# Altium PCB uARM.PcbDoc
Units mm, origin at the board's own origin, x right, y up, seen from the top; angles counter-clockwise.
Board outline 93 x 72.5 mm, 2 copper layers (Top Layer, Bottom Layer); 54 components, 40 nets, 216 pads, 71 vias.
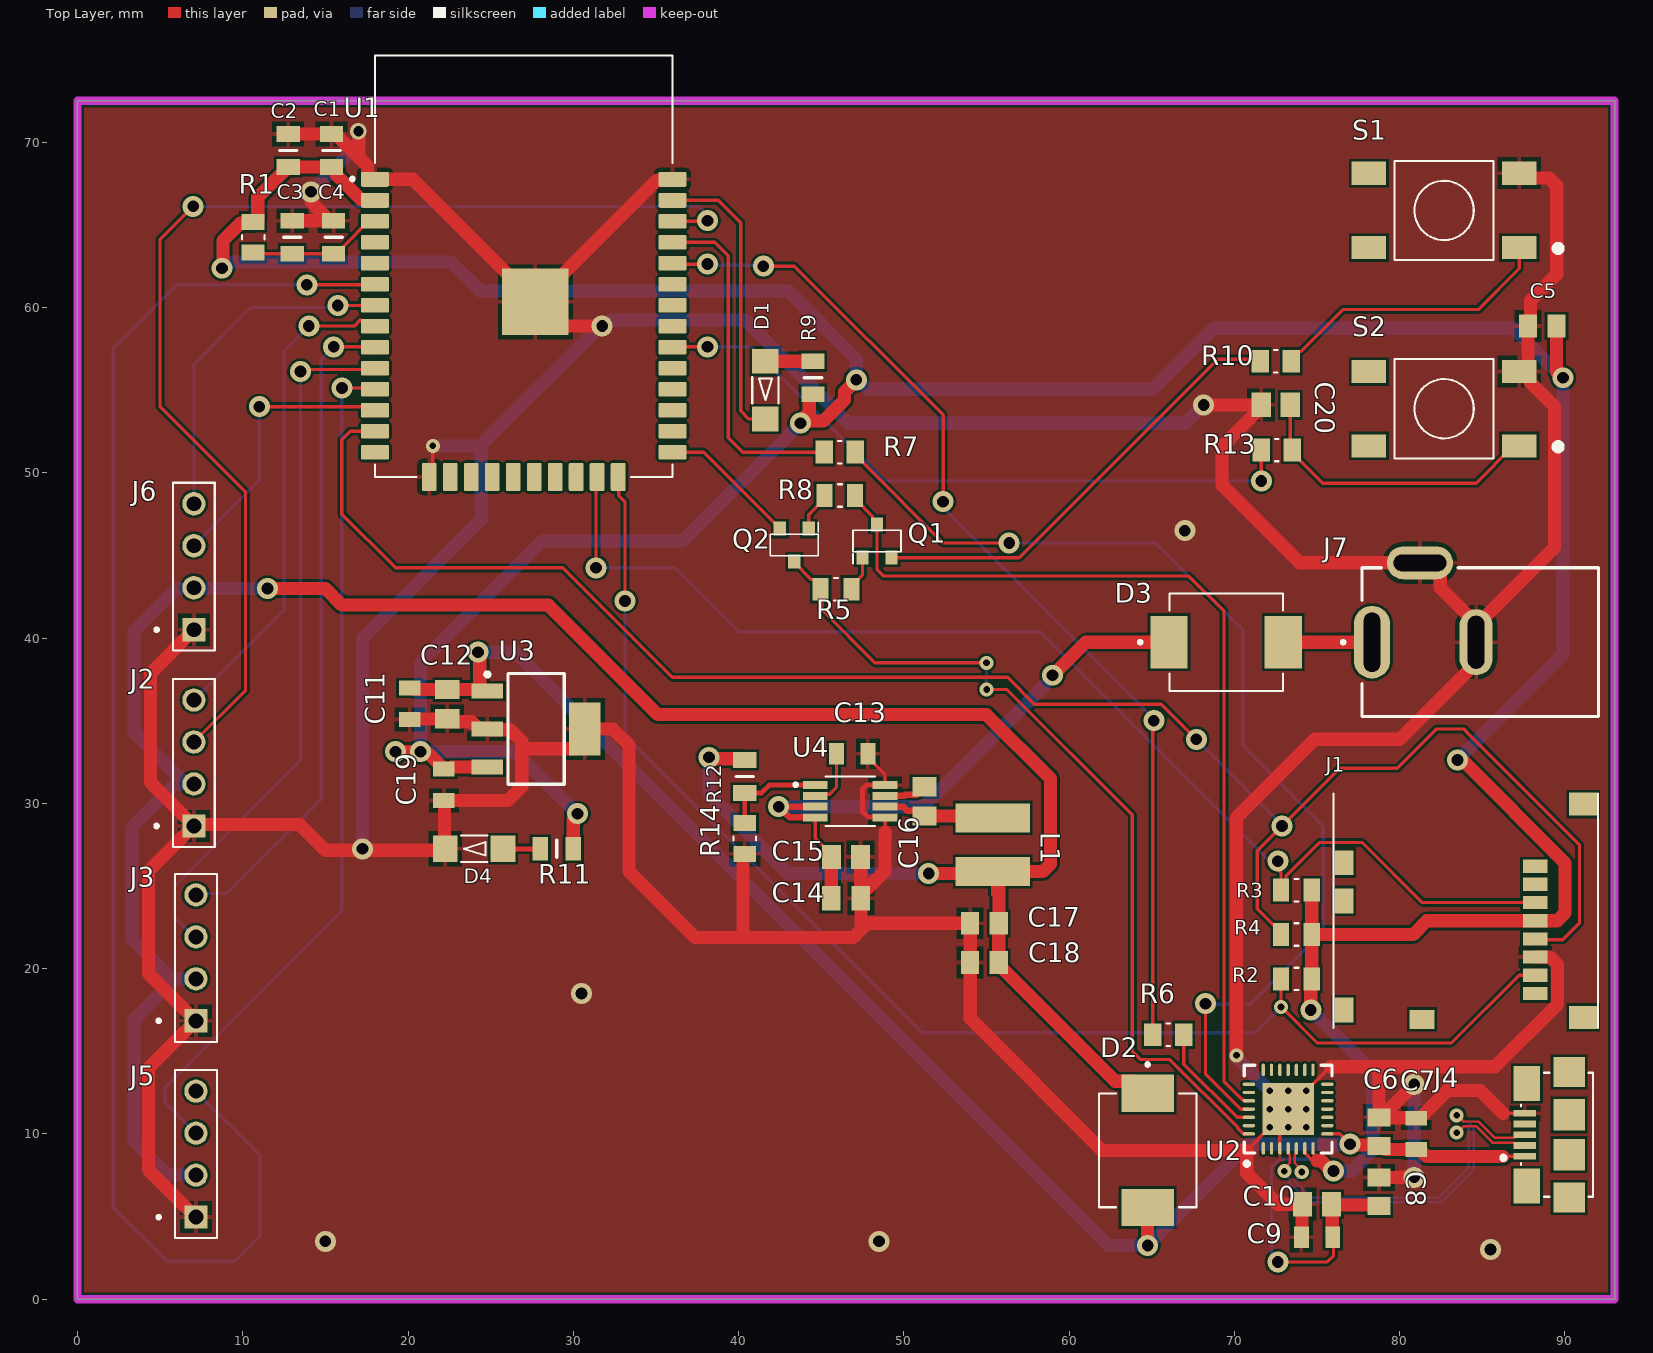
[diagram p0: Top Layer view]
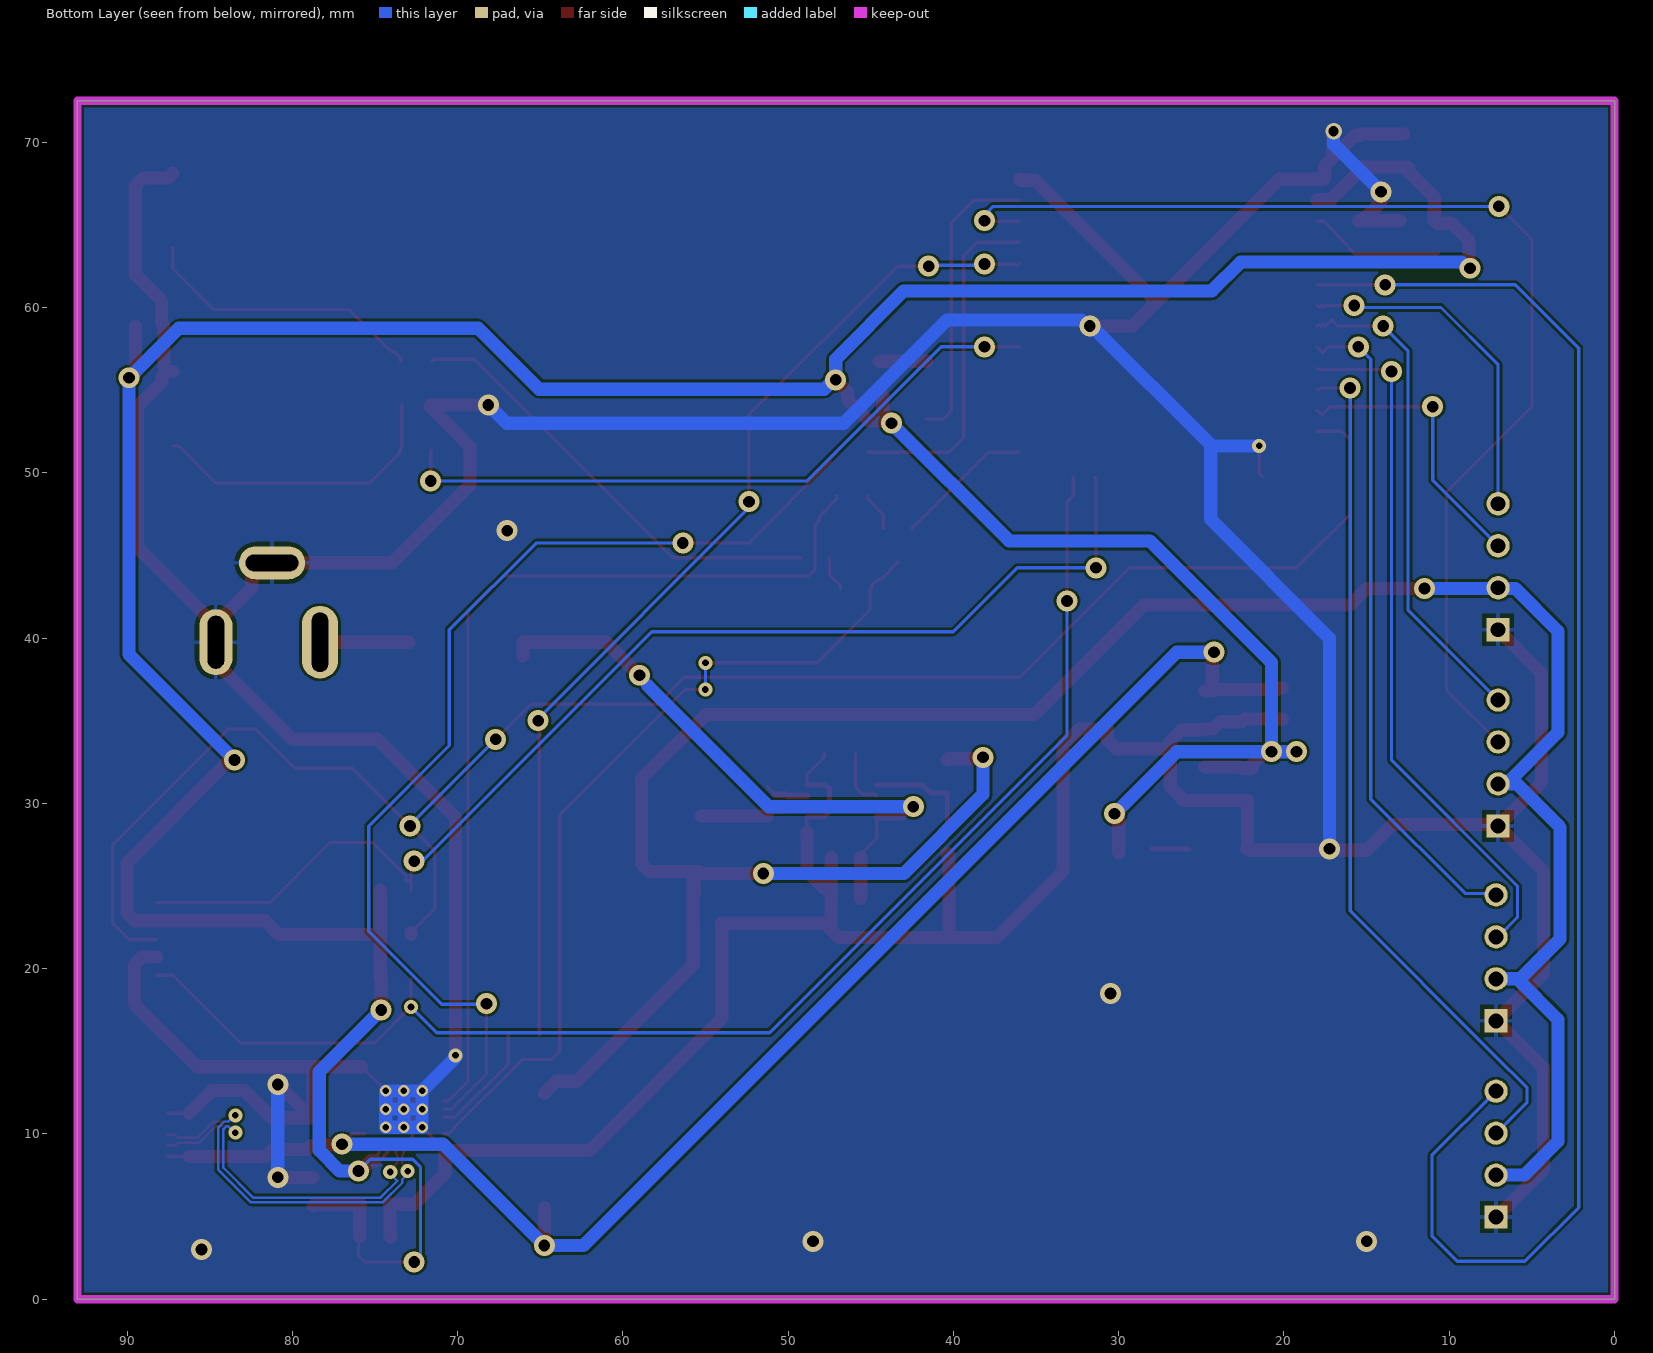
[diagram p1: Bottom Layer view, seen from below]
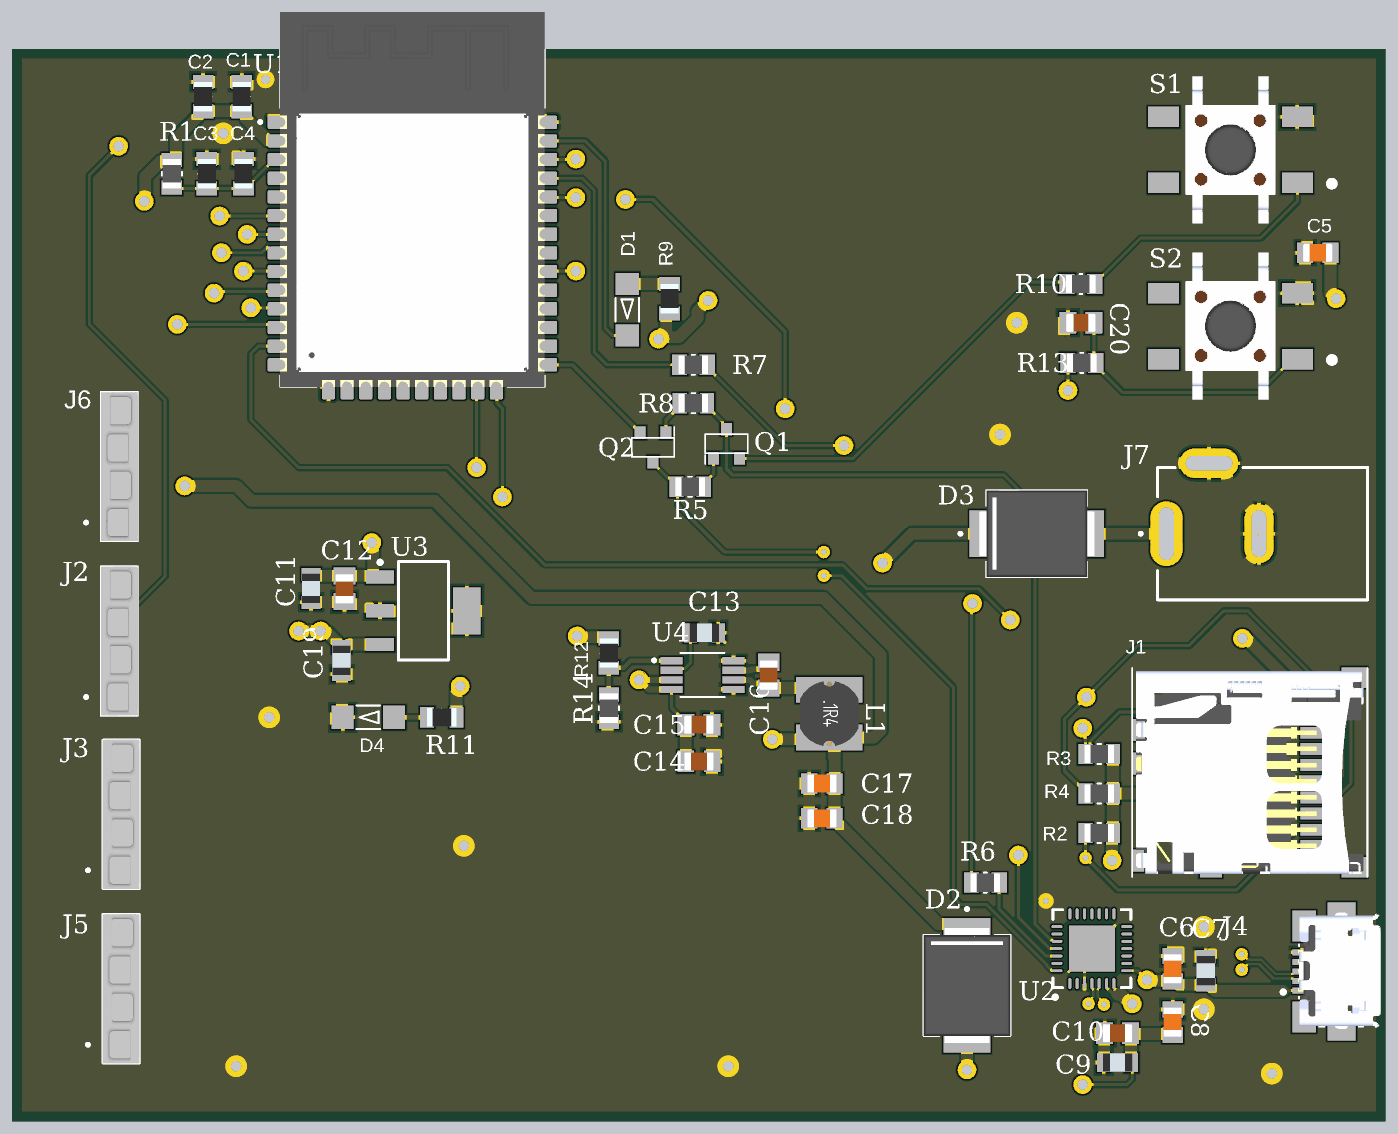
[diagram p2: 3D render of the assembled board from above, using the file's embedded part models]

## Layer stack, top to bottom
Top Solder: solder mask 0.0102, Solder Resist, Dk 3.5
Top Layer: signal copper 0.0356
Dielectric 1: dielectric 0.32, FR-4, Dk 4.8
Bottom Layer: signal copper 0.0356
Bottom Solder: solder mask 0.0102, Solder Resist, Dk 3.5

## Board outline
0,0 0,72.5 93,72.5 93,0

## Design rules (kind name [scope] priority, off if disabled: settings)
Clearance [All] p1: gap=0.15 ignorepadtopadclearanceinfootprint=FALSE
DiffPairsRouting [All] p1: maxlimit=0.15 minlimit=0.15 mostfreqgap=0.15 toplayer_minwidth=0.15 toplayer_maxwidth=0.15 toplayer_prefwidth=0.15 bottomlayer_minwidth=0.15 bottomlayer_maxwidth=0.15 bottomlayer_prefwidth=0.15 maxuncoupledlength=12.7
HoleSize [All] p1: absolutevalues=TRUE maxlimit=3.6 minlimit=0.3 maxpercent=80.000 minpercent=20.000
HoleToHoleClearance [All] p1: gap=0.254 allowstackedmicrovias=FALSE
PolygonConnect [All] p1: thpad.connectstyle=Relief thpad.reliefconductorwidth=0.254 thpad.reliefentries=4 thpad.polygonreliefangle="90 Angle" thpad.airgapwidth=0.254 smdpad.connectstyle=Relief smdpad.reliefconductorwidth=0.254 smdpad.reliefentries=4 smdpad.polygonreliefangle="90 Angle" smdpad.airgapwidth=0.254 via.connectstyle=Direct via.reliefconductorwidth=0.254 via.reliefentries=4 via.polygonreliefangle="90 Angle" via.airgapwidth=0.254
RoutingVias [All] p1: holewidth=0.4 width=0.85 viastyle="Through Hole" minholewidth=0.4 minwidth=0.7 maxholewidth=0.8 maxwidth=1.5
SilkToSilkClearance [All] p1: silktosilkclearance=0
SilkToSolderMaskClearance [IsPad] p1: minsilkscreentomaskgap=0.15 clearancetoexposedcopper=TRUE
SolderMaskExpansion [All] p1: expansion=0.102 istentingtop=FALSE
Width [All] p1: maxlimit=0.8 minlimit=0.15 preferedwidth=0.2
25 further rules are at their usual default settings.

## Classes and differential pairs
differential pair USB: +USB_P -USB_N

## Components (designator, comment, footprint, x,y, rotation, side; value= is the part's Value field where it differs from the comment)
C1 "08055C104KAT4A" RESC2012X60N 15.375,69.5 r270 top value=0.1uF/50V
C2 "CL21A106KAYNNNE" RESC2012X60N 12.75,69.5 r270 top value=10uF/25V
C3 "CL21A106KAYNNNE" RESC2012X60N 13,64.25 r270 top value=10uF/25V
C4 "08055C104KAT4A" RESC2012X60N 15.5,64.25 r270 top value=0.1uF/50V
C5 "CL21A106KAYNNNE" CAPC2012X135N 88.625,58.875 r0 top value=10uF/25V
C6 "CL21A106KAYNNNE" CAPC2012X135N 78.75,10.137 r270 top value=10uF/25V
C7 "885012207022" WCAP-CSGP_885012207022 81,10 r90 top value=1uF
C8 "CL21A106KAYNNNE" CAPC2012X135N 78.75,6.5 r270 top value=10uF/25V
C9 "885012207022" WCAP-CSGP_885012207022 75,3.75 r180 top value=1uF
C10 "08055C104KAT4A" CAPC2012X94N 75,5.75 r0 top value=0.1uF/50V
C11 "885012207022" WCAP-CSGP_885012207022 20.1,36.025 r270 top value=1uF
C12 "08055C104KAT4A" CAPC2012X94N 22.375,36 r90 top value=0.1uF/50V
C13 "885012207022" WCAP-CSGP_885012207022 46.875,33 r180 top value=1uF
C14 "GRM21BR61H106KE43L" CAPC2012X145N 46.5,24.25 r180 top value=10uF/50V
C15 "08055C104KAT4A" CAPC2012X94N 46.5,26.75 r180 top value=0.1uF/50V
C16 "08055C104KAT4A" CAPC2012X94N 51.25,30.12 r270 top value=0.1uF/50V
C17 "CL21A106KAYNNNE" CAPC2012X135N 54.875,22.75 r0 top value=10uF/25V
C18 "CL21A106KAYNNNE" CAPC2012X135N 54.875,20.375 r0 top value=10uF/25V
C19 "885012207022" WCAP-CSGP_885012207022 22.175,31.125 r270 top value=1uF
C20 "08055C104KAT4A" CAPC2012X94N 72.5,54.107 r0 top value=0.1uF/50V
D1 "WL-SMRW" WL-SMRW-1206-RECT 41.625,55 r90 top
D2 "SS34" DIOM7959X265N 64.75,9 r270 top
D3 "SS34" DIOM7959X265N 69.5,39.75 r0 top
D4 "WL-SMRW" WL-SMRW-1206-RECT 24,27.25 r0 top
J1 "502570-0893" MOLEX_502570-0893 84,23.5 r270 top
J2 "215297-4" TE_215297-4 7.046,32.441 r90 top
J3 "215297-4" TE_215297-4 7.171,20.651 r90 top
J4 "10118192-0001LF" AMPHENOL_10118192-0001LF 87.575,9.95 r90 top
J5 "215297-4" TE_215297-4 7.171,8.776 r90 top
J6 "215297-4" TE_215297-4 7.046,44.316 r90 top
J7 "DCJ235-05-A-XX-X_REVA" GCT_DCJ235-05-A-XX-X_REVA 84.875,39.75 r90 top
L1 "744773122" WE-PD2-S 55.375,27.5 r270 top
Q1 "SS8050-G" MBTB-T-SOT23 48.375,45.875 r90 top
Q2 "SS8050-G" MBTB-T-SOT23 43.375,45.625 r270 top
R1 "ESR10EZPF1002" RESC2012X65N 10.625,64.25 r90 top value=10K/1%
R2 "ESR10EZPF1002" RESC2012X65N 73.75,19.375 r0 top value=10K/1%
R3 "ESR10EZPF1002" RESC2012X65N 73.75,24.75 r0 top value=10K/1%
R4 "ESR10EZPF1002" RESC2012X65N 73.75,22.063 r0 top value=10K/1%
R5 "ESR10EZPF1002" RESC2012X65N 45.9,42.95 r0 top value=10K/1%
R6 "ERJ-PB6B4700V" RESC2012X70N 66,16 r0 top value=470R
R7 "ERJ-PB6B4700V" RESC2012X70N 46.125,51.25 r0 top value=470R
R8 "ESR10EZPF1002" RESC2012X65N 46.125,48.625 r180 top value=10K/1%
R9 "RK73H2ATTD1100F" RESC2012X60N 44.5,55.75 r270 top
R10 "ERJ-PB6B4700V" RESC2012X70N 72.5,56.75 r0 top value=470R
R11 "RK73H2ATTD1100F" RESC2012X60N 29,27.25 r0 top
R12 "ERJ-PB6B5232V" RESC2012X60N 40.375,31.625 r90 top value=52K3
R13 "ERJ-PB6B4700V" RESC2012X70N 72.565,51.375 r0 top value=470R
R14 "ESR10EZPF1002" RESC2012X65N 40.375,27.875 r90 top value=10K/1%
S1 "5-1437565-0" SW_5-1437565-0 82.685,65.875 r180 top
S2 "5-1437565-0" SW_5-1437565-0 82.685,53.875 r180 top
U1 "ESP-WROOM-32" MODULE_ESP-WROOM-32 27,59.5 r0 top
U2 "CP2109-A01-GM" SLAB-QFN-28-3125x3125TP_L 73.25,11.5 r90 top
U3 "TC1264-3.3VDBTR" SOT-223-DB3_L 27.75,34.5 r0 top
U4 "MCP16311T-E/MS" SOP65P490X110-8N 46.75,30.125 r0 top

## Footprints (in the part's own frame and the unit in brackets; to place one, negate y for a bottom-side part, rotate by r counter-clockwise, add the part's x,y. Pads: shape width x height; smd on the part's side, far side on the other; paste and mask are expansions set on the pad)
AMPHENOL_10118192-0001LF [mm]
  rect 0.4x1.35 smd: 1(-1.3,0) 2(-0.65,0) 3(0,0) 4(0.65,0) 5(1.3,0)
  rect 2.1x1.6 smd: SH1(-3.1,-0.125) SH2(3.1,-0.125)
  rect 1.8x1.9 smd: SH3(-3.8,-2.675) SH6(3.8,-2.675)
  rect 1.9x1.9 smd: SH4(-1.2,-2.675) SH5(1.2,-2.675)
  silkscreen extent -3.75,-4.13 3.75,1.4, body extent -3.9,-5.34 4,0.28, height 2.7
CAPC2012X94N [mm]
  rect 1.16x1.47 smd: 1(-0.88,0) 2(0.88,0)
  body extent -1,-0.62 1.01,0.63, height 0.94
CAPC2012X135N [mm]
  rect 1.1x1.38 smd: 1(-0.863,0) 2(0.863,0)
  body extent -1,-0.63 1,0.63, height 1.35
CAPC2012X145N [mm]
  rect 1.11x1.47 smd: 1(-0.9,0) 2(0.9,0)
  body extent -1,-0.63 1,0.63, height 1.45
DIOM7959X265N [mm]
  rect 2.25x3.18 smd: A(3.455,0) C(-3.455,0)
  silkscreen extent -5.3,-2.95 3.44,2.95, body extent -3.97,-2.95 3.98,2.95, height 1.2
GCT_DCJ235-05-A-XX-X_REVA [mm]
  oval 4.4x2.2 hole 1 slot 3.6 at 0 deg: 1(0,6.55)
  oval 4x2 hole 1 slot 3.2 at 0 deg: 2(0,0.25)
  oval 2x4 hole 1 slot 3.2 at 90 deg: 3(4.8,3.65)
  silkscreen extent -4.5,-7.15 4.5,8.4
MBTB-T-SOT23 [mm]
  rect 0.85x0.75 smd: 1(-1,0.875) 2(-1,-0.875) 3(1,0)
  silkscreen extent -1.37,-1.45 0.65,1.45
MODULE_ESP-WROOM-32 [mm]
  rrect22% 1.7x0.9 smd: 1(-9,8.255) 2(-9,6.985) 3(-9,5.715) 4(-9,4.445) 5(-9,3.175) 6(-9,1.905) 7(-9,0.635) 8(-9,-0.635) 9(-9,-1.905) 10(-9,-3.175) 11(-9,-4.445) 12(-9,-5.715) 13(-9,-6.985) 14(-9,-8.255) 25(9,-8.255) 26(9,-6.985) 27(9,-5.715) 28(9,-4.445) 29(9,-3.175) 30(9,-1.905) 31(9,-0.635) 32(9,0.635) 33(9,1.905) 34(9,3.175) 35(9,4.445) 36(9,5.715) 37(9,6.985) 38(9,8.255)
  rect 4x4 smd: 1.1(0.7,0.845)
  rrect22% 0.9x1.7 smd: 15(-5.715,-9.755) 16(-4.445,-9.755) 17(-3.175,-9.755) 18(-1.905,-9.755) 19(-0.635,-9.755) 20(0.635,-9.755) 21(1.905,-9.755) 22(3.175,-9.755) 23(4.445,-9.755) 24(5.715,-9.755)
  silkscreen extent -10.46,-9.75 9,15.75, body extent -9,-9.75 9,15.75, height 3.25
MOLEX_502570-0893 [mm]
  rect 0.8x1.5 smd: 1(-2.7,4.2) 2(-1.6,4.2) 3(-0.5,4.2) 4(0.6,4.2) 5(1.7,4.2) 6(2.8,4.2) 7(3.9,4.2) 8(5,4.2)
  rect 1.15x1.5 smd: DL(6.575,-2.65)
  rect 1.5x1.15 smd: DS(-0.6,-7.375) SM3(-2.9,-7.375) SM4(6,-7.375)
  rect 1.4x1.7 smd: SM1(-6.45,7.1) SM2(6.45,7.1)
  silkscreen extent -7.1,-8 7.1,8, body extent -6.9,-7.75 6.9,7.75, height 1.95
RESC2012X60N [mm]
  rect 0.95x1.4 smd: 1(-1,0) 2(1,0)
  silkscreen extent 0,-0.53 0,0.53, body extent -1,-0.63 1,0.63, height 0.6
RESC2012X65N [mm]
  rect 0.97x1.38 smd: 1(-0.93,0) 2(0.93,0)
  silkscreen extent -0.12,-0.68 0.12,0.68, body extent -1,-0.63 1,0.63, height 0.65
RESC2012X70N [mm]
  rect 1.04x1.38 smd: 1(-0.94,0) 2(0.94,0)
  silkscreen extent -0.1,-0.68 0.1,0.68, body extent -1,-0.63 1,0.63, height 0.7
SLAB-QFN-28-3125x3125TP_L [mm] "QFN, 28-Leads, Body 5x5mm, Pitch 0.5mm, Thermal Pad 3.13x3.13mm, IPC High Density"
  oval 0.75x0.2 smd: 1(-2.375,1.5) 2(-2.375,1) 3(-2.375,0.5) 4(-2.375,0) 5(-2.375,-0.5) 6(-2.375,-1) 7(-2.375,-1.5) 15(2.375,-1.5) 16(2.375,-1) 17(2.375,-0.5) 18(2.375,0) 19(2.375,0.5) 20(2.375,1) 21(2.375,1.5)
  oval 0.2x0.75 smd: 8(-1.5,-2.375) 9(-1,-2.375) 10(-0.5,-2.375) 11(0,-2.375) 12(0.5,-2.375) 13(1,-2.375) 14(1.5,-2.375) 22(1.5,2.375) 23(1,2.375) 24(0.5,2.375) 25(0,2.375) 26(-0.5,2.375) 27(-1,2.375) 28(-1.5,2.375)
  rect 3.13x3.13 smd: 29(0,0)
  silkscreen extent -3.42,-2.65 2.65,2.65, body extent -2.5,-2.5 2.5,2.5, height 1
SOP65P490X110-8N [mm]
  rect 1.5x0.49 smd: 1(-2.105,0.975) 2(-2.105,0.325) 3(-2.105,-0.325) 4(-2.105,-0.975) 5(2.105,-0.975) 6(2.105,-0.325) 7(2.105,0.325) 8(2.105,0.975)
  silkscreen extent -3.4,-1.5 1.5,1.5
SOT-223-DB3_L [mm] "SOT223, 4-Leads, Body 6.5x3.5mm, Pitch 2.3mm, Lead Span 7mm, IPC High Density"
  rect 1.9x0.9 smd: 1(-2.95,2.3) 2(-2.95,0) 3(-2.95,-2.3)
  rect 1.9x3.2 smd: 4(2.95,0)
  silkscreen extent -3.07,-3.35 1.7,3.42, body extent -1.85,-3.35 1.85,3.35, height 1.8
SW_5-1437565-0 [mm]
  rect 2.1x1.4 smd: 1(-4.55,2.25) 2(4.55,2.25) 3(-4.55,-2.25) 4(4.55,-2.25)
  silkscreen extent -7.1,-3 3,3, body extent -3,-5 3,5, height 7.26
TE_215297-4 [mm]
  rect 1.408x1.408 hole 0.9: 1(-3.81,0)
  round 1.408 hole 0.9: 2(-1.27,0) 3(1.27,0) 4(3.81,0)
  silkscreen extent -5.08,-1.26 5.08,2.36, body extent -5.08,-1.26 5.08,1.26, height 7.3
WCAP-CSGP_885012207022 [mm]
  rect 0.9x1.3 smd: 1(-0.95,0) 2(0.95,0)
  body extent -1,-0.62 1,0.63, height 0.63
WE-PD2-S [mm] "SMD Inductor, 2-Leads, Body 4.5 x 4.0 mm"
  rect 1.75x4.5 smd: 1(-1.625,0) 2(1.625,0)
  body extent -2.23,-2 2.23,2, height 3.17
WL-SMRW-1206-RECT [mm]
  rect 1.5x1.6 smd: 1(-1.75,0) 2(1.75,0)
  silkscreen extent -0.8,-0.8 0.8,0.8

## Part data
C1 C4 C10 C12 C15 C16 C20: ".1UF 50V 10% 0805", Package=None, Availability=Unavailable, MF="{'manufacturer': u'AVX'}", MP=08055C104KAT4A, Price=None
C2 C3 C5 C6 C8 C17 C18: "Cap Ceramic 10uF 25V X5R 10% SMD 0805 85Â°C Embossed T/R", Package=None, Availability=Unavailable, MF="{'manufacturer': u'Samsung'}", MP=CL21A106KAYNNNE, Price=None
C7 C9 C11 C13 C19: "<b> WCAP-CSGP Ceramic Capacitors <br> <br> <br><b>Characteristics </b><br> </b><br>Multilayer Ceramic Chip Capacitor <br>Recommended soldering:Reflow, for 0603 and 0805 wave soldering is also allowed <br>Operating temperature:-55 Â°C to +125 Â°C; <br>Ceramic characteristics: Class I - NPO ; Class II -X7R, X5R <br>High performance ceramic <br>High capacitance stability <br>Minimal aging  <br>Termination:Cu/Ni/Sn <br>   <br><a href=\"http://katalog.we-online.de/media/images/eisos/WCAP-CSGP_pf2.jpg\" title=\"Enlarge picture\"> <img src=\"http://katalog.we-online.de/media/thumbs2/eisos/thb_WCAP-CSGP_pf2.jpg\" width=\"320\"></a><p> Details see: <a href=\"http://katalog.we-online.de/en/pbs/WCAP-CSGP-0805?\">http://katalog.we-online.de/en/pbs/WCAP-CSGP-0805? </a><p>Created:  2015-01-28 <br>2015 (C) Wurth Elektronik", Package=None, Availability=Unavailable, MF="{'manufacturer': u'Wurth Electronics Inc'}", MP=885012207022, Price=None
C14: "SMD Capacitor X5R(EIA) with Capacitance: 10uF Tol. 10%. Rated Voltage: 50Vdc", Package=None, Availability=Unavailable, MF="{'manufacturer': u'Murata Electronics'}", MP=GRM21BR61H106KE43L, Price=None
D1 D4: "<b>SMD Reverse mount mono-color rectangular <br> <br> <br><b> Characteristics <br><br></b></b> Small size & thin body for space saving  <br> Ideal for narrow space applications  <br> Wide viewing angle  <br> Low power consumption  <br> Industry standard footprint  <br> Small package for exceptional brightness <br> To emit light through a small cut-out hole in PCB  <br> Compatible with automatic placement machine <br>  <br><b> Applications  <br><br></b> Front panel indicators  <br> LCD backlighting  <br> Keypad backlighting  <br> Push button backlighting  <br> Symbol and switch backlighting  <br> General lighting <br> <br> <br> <br><a href=\"http://katalog.we-online.de/media/images/eipal/WL-SMRW_pf2.jpg\" title=\"Enlarge picture\"> <img src=\"http://katalog.we-online.de/media/thumbs2/eipal/thb_WL-SMRW_pf2.jpg\" width=\"320\"></a><p> Details see: <a href=\"http://katalog.we-online.de/en/led/WL-SMRW?m\">http://katalog.we-online.de/en/led/WL-SMRW?m</a><p>  </b>Updated  2015-04-10<br> </b>2015 (C) Wurth Elektronik", Package=None, Availability=Unavailable, MF="{'manufacturer': u'Wurth Electronics'}", MP=WL-SMRW, Price=None
D2 D3: "Diode Schottky 40V 3A 2-Pin SMC T/R", Package=None, Availability=Unavailable, MF="{'manufacturer': u'ON Semiconductor'}", MP=SS34, Price=None
J1: "<b>1.10mm Pitch microSD Memory Card Connector, Normal Mount Surface Mount, Push-Push Type</b><p>http://www.snapeda.com/parts/502570-0893/Molex/view-part/", Package=None, Availability=Unavailable, MF="{'manufacturer': u'Molex'}", MP=502570-0893, Price=None
J2 J3 J5 J6 R6 R7 R10 R12 R13: Package=None, Availability=Unavailable, Price=None
  J2 J3 J5 J6: MF="{'manufacturer': u'TE Connectivity'}", MP=215297-4
  R6 R7 R10 R13: MF="{'manufacturer': u'Panasonic'}", MP=ERJ-PB6B4700V
  R12: MP=ERJ-PB6B5232V
J4: "Single Port 5 Contact Horizontal Right Angle Shielded Micro B USB 2.0 Connector", Package=None, Availability=Unavailable, MF="{'manufacturer': u'FCI'}", MP=10118192-0001LF, Price=None
J7: "DC Power Jack, Thru-Hole, Horizontal, with Locating Pegs, D2.35mm", Package=None, Availability=Unavailable, MF="{'manufacturer': u'Global Connector Technology'}", MP=DCJ235-05-A-XX-X_REVA, Price=None
L1: "SMD Power Inductor WE-PD2, L = 22.0 µH", Inductance="22.0 µH", ComponentLink1Description="Manufacturer Link", ComponentLink1URL=http://www.we-online.com, ComponentLink2Description=Datasheet, ComponentLink2URL=http://www.we-online.de/katalog/media/pdf/744773122.pdf, DatasheetVersion="ver 1, Oct-2004", PackageDescription="SMD Inductor, 2-Leads, Body 4.5 x 4.0 mm", PackageReference=WE-PD2-S, PackageVersion=2004, PartNumber=744773122
Q1 Q2: "<b>Bipolar Transistors - BJT NPN TRANSISTOR 1.5A 40V</b><p> Source: <a href=\"https://componentsearchengine.com/Datasheets/1/SS8050-G.pdf\"> Datasheet </a>", Package=None, Availability=Unavailable, MF="{'manufacturer': u'Comchip Technology'}", MP=SS8050-G, Price=None
R1 R2 R3 R4 R5 R8 R14: "RES SMD 10K OHM 1% 0.4W 0805", Package=None, Availability=Unavailable, MF="{'manufacturer': u'Rohm'}", MP=ESR10EZPF1002, Price=None
R9 R11: "Resistor", Manufacturer_Name="KOA Speer", Datasheet Link=http://www.koaspeer.com/catimages/Products/RK73H/RK73H.pdf, Height=0.6mm, Manufacturer_Part_Number=RK73H2ATTD1100F
S1 S2: "Switch Tactile OFF (ON) Round Button Gull Wing 0.05A 12VDC 1.57N SMD T/R", Package=None, Availability=Unavailable, MF="{'manufacturer': u'TE Connectivity'}", MP=5-1437565-0, Price=None
U1: "Module: combo; GPIO, I2C x2, I2S x2, SDIO, SPI x3, UART x3; 19.5dBm", Package=None, Availability=Unavailable, MF="{'manufacturer': u'Espressif Systems'}", MP=ESP-WROOM-32, Price=None
U2: "Single-Chip USB to UART Bridge, 1024 Bytes EEPROM, -40 to 85 degC, 28-pin QFN, Tube", Manufacturer="Silicon Labs", Code_IPC=J-STD-020C, Code_JEDEC=MO-220, ComponentLink1Description="Manufacturer URL", ComponentLink1URL=http://www.silabs.com/, ComponentLink2Description=Datasheet, ComponentLink2URL=http://www.silabs.com/Support%20Documents/TechnicalDocs/CP2102-9.pdf, ComponentLink3Description="Package Specification", ComponentLink3URL=http://www.silabs.com/Support%20Documents/TechnicalDocs/C8051T61x.pdf, DatasheetVersion="Rev. 1.5", EEPROM="1024 Bytes", Internal Oscillator=TRUE, Mounting Technology="Surface Mount", PackageDescription="28-Pin Quad-Flat No-Leads Package, Body 5 x 5 mm, Pitch 0.5 mm", PackageReference=QFN-28, PartNumber=CP2109-A01-GM, Sub-Family="USB Bridges"
U3: "800 mA Fixed-Output CMOS LDO with Shutdown, 3-Pin SOT-223, Extended Temperature, Tape and Reel", DatasheetVersion="revC, Oct-2006", PackageDescription="3-Lead Plastic Small Outline Transistor (DB) [SOT-223]", PackageReference=SOT-223-DB3, PackageVersion="revBB, Aug-2009", PartNumber=TC1264-3.3VDBTR
U4: "The MCP16311/2 is a compact, high-efficiency, fixed frequency, synchronous step-down DC-DC converter in an 8-pin MSOP, or 2 x 3 TDFN package that operates from input voltage sources up to 30V. Integrated features include a high-side and a low-side switch, fixed frequency peak current mode control, internal compensation, peak current limit and overtemperature protection. The MCP16311/2 provides all the active functions for local DC-DC conversion, with fast transient response and accurate regulation.", Package=None, Availability=Unavailable, MF="{'manufacturer': u'Microchip Technology'}", MP=MCP16311T-E/MS, Price=None

## Via types
v1: diameter 1.27, hole 0.711, Top Layer to Bottom Layer, 52 vias
v2: diameter 0.85, hole 0.4, Top Layer to Bottom Layer, 9 vias
v3: diameter 0.7, hole 0.4, Top Layer to Bottom Layer, 9 vias
v4: diameter 1, hole 0.62, Top Layer to Bottom Layer, 1 vias

## Nets (pads, with @x,y where several pads share a name; then routed paths per layer and width w, separated by ;. In a path a pad name is that pad's centre, name@x,y a point inside that pad or via, vN(x,y) a via of type N, cw(c..) or ccw(c..) an arc to the next point about the centre after c; other vN are vias at no path point)
DTR: Q2.3 R5.1 U2.28 | length 52
  Top Layer w0.2: Q2.3 43.375,44.575 44.41,43.54 44.585,43.54 44.97,43.155 R5.1 45.048,42.872 45.048,41.702 48.25,38.5 v2(55,38.5) ; v2(55.013,36.888) 56.237,36.888 63.825,29.3 63.825,15.013 64.338,14.5 66.093,14.5 70.2,10.393 70.2,10.334 70.534,10 U2.28
  Bottom Layer w0.2: v2(55,38.5) 55,36.901 v2(55.013,36.888)
EN: Q1.2 R10.1 | length 27.3
  Top Layer w0.2: Q1.2 49.26,44.865 56.99,44.865 69,56.875 71.435,56.875 R10.1
GND: C1.1 C2.1 C3.1 C4.1 C5.1 C6.1 C7.2 C8.1 C9.2 C10.1 C11.2 C12.1 C13.1 C14.1 C15.1 C17.1 C18.1 C19.2 C20.1 D4.1 J1.6 J2.1 J3.1 J4.5 J5.1 J6.1 J7.2 J7.3 R14.1 S1.3 S2.3 U1.1 U1.1.1 U1.15 U1.38 U2.3 U2.29 U3.2 U3.4 U4.5 U4.8 | length 469.4
  Top Layer w0.2: U1.15 21.5,49.96 v2(21.5,51.625) ; C14.1@47.4,24.242 47.825,24.667 47.825,24.855 47.4,24.43 C14.1 ; C13.1 47.825,32.8 48.855,31.77 U4.8 ; U4.5@48.842,29.163 U4.5 48.875,29.13 48.875,28.25 ; 70.743,8.993 v3(72.15,10.4) U2.29@72.75,11 ; v3(72.15,11.5) 72.131,11.519 72.131,12.041 U2.29@72.709,12.041 ; v3(72.15,12.6) U2.29@72.709,12.041 ; U2.3 U2.29@72.75,11 ; v3(73.25,10.4) v3(73.25,11.5) ; v3(74.35,11.5) 74.35,12.041 U2.29@73.791,12.041 ; 75.813,14.062 v3(74.35,12.6) U2.29@73.791,12.041 ; 86.25,11.25 J4.5 ; U2.29@72.709,12.041 v3(73.25,11.5) ; U2.29@72.75,11 v3(73.25,11.5) ; v3(73.25,11.5) 73.25,12.041 U2.29@73.791,12.041
  Top Layer w0.3: U4.5@48.842,29.163 47.837,29.163 47.5,29.5 47.5,30.875 47.725,31.1 U4.8
  Top Layer w0.8: J6.1 4.421,37.881 4.421,31.256 J2.1 ; J5.1 4.296,7.841 4.296,13.966 J3.1 4.296,19.716 4.296,25.881 J2.1 ; C2.1 C1.1 15.45,70.425 15.675,70.425 17.038,69.062 ; C3.1 C4.1@15.275,65.25 ; v1(14.125,67) 14.125,66.4 C4.1@15.275,65.25 ; C4.1 C4.1@15.275,65.25 ; v4(17,70.671) 17.038,70.633 17.038,69.062 ; C11.2 20.122,35.098 22.353,35.098 C12.1 22.555,34.94 23.86,34.94 24.3,34.5 U3.2 24.85,34.45 26.175,34.45 26.875,33.75 26.875,33.3 ; D4.1@22.093,27.168 15,27.168 13.454,28.714 7.129,28.714 J2.1 ; D4.1 22.213,27.287 22.213,30.138 C19.2 26.05,30.175 26.875,31 26.875,33.3 ; v1(31.75,58.875) 29.17,58.875 U1.1.1 ; U1.38 35.95,67.705 35.06,67.705 U1.1.1 ; R14.1 40.359,26.945 40.274,26.86 40.274,21.875 ; C15.1 47.39,26.74 47.39,24.26 C14.1 47.4,24.242 47.4,22.344 ; C14.1@47.825,24.855 48.855,25.885 48.855,28.23 48.875,28.25 ; v1(68.142,54.108) C20.1 71.62,53.953 70.226,52.559 69.25,51.582 69.25,49.25 70.226,48.274 73.95,44.55 J7.3 81.9,44.55 82.455,43.996 82.455,43.045 84.625,40.875 J7.2@84.625,40.75 ; v2(70.125,14.75) 70.125,29.125 74.875,33.875 80,33.875 84.625,38.5 J7.2 J7.2@84.625,40.75 ; C9.2 74.085,3.785 74.085,5.715 C10.1 72.625,5.75 70.743,7.632 70.743,8.993 62.007,8.993 54.012,16.988 C18.1 C17.1 47.806,22.75 47.4,22.344 ; 75.813,14.062 79.063,14.062 ; C8.1 80.113,7.363 80.125,7.375 v1(80.875,7.375) ; v1(80.875,12.985) 80.375,12.485 78.89,11 C6.1 ; 86.25,11.25 84.875,12.625 82.875,12.625 81.2,10.95 C7.2 80.975,10.975 78.775,10.975 C6.1 ; S2.3 87.585,56.125 87.885,55.825 87.885,55.475 89.375,53.985 89.375,45.5 J7.2@84.625,40.75 ; S1.3 87.516,67.844 89.031,67.844 89.5,67.375 89.5,62 87.912,60.412 87.912,59.025 C5.1 S2.3@87.762,56.425 ; J1.6 89.099,20.7 89.55,20.248 89.55,17.851 85.761,14.062 79.063,14.062 ; 17.038,69.062 17.55,68.55 17.55,67.805 17.6,67.755 U1.1 20.29,67.755 U1.1.1 ; 26.875,33.3 30.15,33.3 30.7,33.85 U3.4 30.706,34.494 32.381,34.494 33.375,33.5 33.375,25.875 37.375,21.875 40.274,21.875 ; 40.274,21.875 46.931,21.875 47.4,22.344 ; C6.1 78.75,13.75 79.063,14.062
  Bottom Layer w0.8: v1(14.125,67) 17,69.875 v4(17,70.671) ; v1(17.25,27.25) 17.25,40 24.438,47.188 24.438,51.562 ; v2(21.5,51.625) 24.375,51.625 31.687,58.938 v1(31.75,58.875) 31.877,58.875 32.252,59.25 40.375,59.25 46.625,53 67.035,53 v1(68.142,54.108) ; v2(70.125,14.75) 70.125,14.625 v3(72.15,12.6) ; v1(80.875,7.375) v1(80.875,12.985) ; v3(72.15,11.5) v3(72.15,12.6) ; v3(72.15,11.5) v3(72.15,10.4) v3(73.25,10.4) ; v3(72.15,11.5) v3(73.25,11.5) ; v3(72.15,12.6) v3(73.25,12.6) ; v3(73.25,10.4) v3(73.25,11.5) ; v3(73.25,10.4) v3(74.35,10.4) v3(74.35,11.5) ; v3(73.25,11.5) v3(73.25,12.6) ; v3(73.25,11.5) v3(74.35,11.5) ; v3(73.25,12.6) v3(74.35,12.6) v3(74.35,11.5)
  other v1: 85.5,3 15,3.5 48.5,3.5 30.5,18.5 67,46.5
IO0: Q2.2 U1.25 | length 8.4
  Top Layer w0.2: U1.25 37.88,51.245 42.175,46.95 42.225,46.95 42.5,46.675 Q2.2
IO2/DATA0: J1.7 R2.1 U1.24 | length 83.3
  Top Layer w0.2: U1.24 32.75,49.71 32.75,48.625 33.125,48.25 v1(33.125,42.25) ; R2.1 72.82,19.17 v2(72.82,17.68) 75,15.5 83.125,15.5 87.225,19.6 J1.7
  Bottom Layer w0.2: v1(33.125,42.25) 33.125,34.125 51.125,16.125 71.265,16.125 v2(72.82,17.68)
IO14/CLK: J1.5 R4.1 U1.13 | length 110.4
  Top Layer w0.2: U1.13 16.515,52.515 16,52 16,47.5 19.125,44.375 19.25,44.25 29.375,44.25 36,37.625 56.279,37.625 57.904,36 65.572,36 v1(67.697,33.875) ; R4.1@72.82,22.165 71.375,23.61 71.375,27.125 v1(72.875,28.625) 76.375,32.125 79.867,32.125 82.125,34.383 82.242,34.5 83.883,34.5 84,34.383 84,34.375 90.875,27.5 90.875,22.75 89.875,21.75 88.25,21.75 J1.5
  Top Layer w0.8: R4.1 R4.1@72.82,22.165
  Bottom Layer w0.2: v1(67.697,33.875) 72.875,28.697 v1(72.875,28.625)
IO15/CMD: J1.3 R3.1 U1.23 | length 74
  Top Layer w0.2: v1(31.375,44.25) 31.375,49.675 U1.23 ; v1(72.625,26.5) 72.625,26.008 72.752,25.881 72.82,25.82 R3.1@72.82,25.32 ; R3.1 R3.1@72.82,25.32 ; J1.3 81.375,24 77.75,27.625 75.125,27.625 73.123,25.623 73.123,25.34 73.103,25.32 R3.1@72.82,25.32
  Bottom Layer w0.2: v1(31.375,44.25) 36.125,44.25 40,40.375 58.258,40.375 72.133,26.5 v1(72.625,26.5)
IO18: R13.1 U1.30 | length 40.9
  Top Layer w0.2: U1.30 36.03,57.625 v1(38.125,57.625) ; v1(71.625,49.5) R13.1
  Bottom Layer w0.2: v1(38.125,57.625) 40.75,57.625 48.875,49.5 v1(71.625,49.5)
IO22/PWM22: J2.3 U1.36 | length 70.5
  Top Layer w0.2: v1(7,66.125) 5,64.125 5,54 10.171,48.829 10.171,36.836 J2.3 ; U1.36 38.09,65.215 v1(38.125,65.25)
  Bottom Layer w0.2: v1(7,66.125) 7.01,66.115 37.603,66.115 37.718,66 37.836,65.883 37.836,65.829 38.125,65.54 v1(38.125,65.25)
IO23: D1.1 U1.37 | length 17.8
  Top Layer w0.2: U1.37 38.765,66.485 40.125,65.125 40.125,53.75 40.625,53.25 D1.1
IO25/PWM25: J3.3 U1.10 | length 42.6
  Top Layer w0.2: v1(13.5,56.125) 13.625,56.25 17.925,56.25 U1.10
  Bottom Layer w0.2: J3.3 7.046,21.921 5.871,23.096 5.871,24.996 13.5,32.625 v1(13.5,56.125)
IO26/PWM26: J5.3 U1.11 | length 52.4
  Top Layer w0.2: v1(16,55.125) 17.82,55.125 17.945,55 U1.11
  Bottom Layer w0.2: J5.3 5.296,11.921 5.296,12.796 7.296,14.796 16,23.5 16,38.125 v1(16,55.125)
IO27/PWM27: J6.3 U1.12 | length 17.4
  Top Layer w0.2: v1(11,54) 17.215,54 17.715,53.5 U1.12
  Bottom Layer w0.2: J6.3 11,49.54 v1(11,54)
IO32/ADC1-4: J2.4 U1.8 | length 30
  Top Layer w0.2: v1(14,58.875) 16.74,58.875 17.115,59.25 17.49,58.875 17.615,59 17.74,58.875 17.865,59 U1.8
  Bottom Layer w0.2: J2.4 12.5,41.705 12.5,57.375 v1(14,58.875)
IO33/ADC1-5: J3.4 U1.9 | length 40.5
  Top Layer w0.2: v1(15.5,57.625) 17.28,57.625 17.655,57.25 U1.9
  Bottom Layer w0.2: J3.4 7.256,24.546 9.046,24.546 14.75,30.25 14.75,56.875 v1(15.5,57.625)
IO34/ADC1-6: J5.4 U1.6 | length 90.6
  Top Layer w0.2: v1(13.875,61.375) 17.97,61.375 U1.6
  Bottom Layer w0.2: J5.4 11.046,8.711 11.046,3.832 9.51,2.296 5.421,2.296 2.171,5.546 2.171,57.546 6,61.375 v1(13.875,61.375)
IO35/ADC1-7: J6.4 U1.7 | length 21.1
  Top Layer w0.2: v1(15.75,60.125) 17.49,60.125 17.615,60 17.74,60.125 17.865,60 U1.7
  Bottom Layer w0.2: J6.4 7.046,56.546 10.5,60 15.625,60 v1(15.75,60.125)
NetC3_2: C3.2 C4.2 R1.1 U1.3 | length 8.3
  Top Layer w0.2: R1.1 10.695,63.25 C3.2 C4.2 15.725,63.25 16.1,63.625 16.1,63.715 17.6,65.215 U1.3
NetC13_2: C13.2 U4.2 | length 3.5
  Top Layer w0.2: U4.2 44.75,30.555 45.519,30.555 45.925,30.961 C13.2
NetC16_1: C16.1 U4.7 | length 2.6
  Top Layer w0.2: C16.1@50.77,30.52 C16.1
  Top Layer w0.4: U4.7 50.025,30.45 50.095,30.52 C16.1@50.77,30.52
NetC16_2: C16.2 L1.1 U4.6 | length 6.8
  Top Layer w0.2: L1.1@55.26,29.24 L1.1
  Top Layer w0.4: U4.6 49.95,29.8 50.198,29.552 50.938,29.552 C16.2
  Top Layer w0.8: C16.2 L1.1@55.26,29.24
NetC20_2: C20.2 R13.2 S2.1 | length 18.4
  Top Layer w0.2: C20.2 73.38,51.5 R13.2 73.505,51.205 75.335,49.375 84.635,49.375 86.885,51.625 S2.1
NetD1_2: D1.2 R9.1 | length 2.9
  Top Layer w0.8: D1.2 R9.1
NetD3_A: D3.A J7.1 | length 5.4
  Top Layer w0.8: D3.A J7.1
NetD4_2: D4.2 R11.1 | length 2.3
  Top Layer w0.3: D4.2 R11.1
NetQ1_1: Q1.1 R5.2 | length 2.2
  Top Layer w0.2: R5.2 46.83,43.155 47.5,43.825 Q1.1
NetQ2_1: Q2.1 R8.2 | length 2.4
  Top Layer w0.2: Q2.1 44.25,47.475 45.195,48.42 R8.2
NetR10_2: R10.2 S1.1 | length 17.5
  Top Layer w0.2: R10.2 73.44,56.92 73.86,57.34 74.03,57.34 76.565,59.875 84.75,59.875 87.235,62.36 S1.1
NetR12_1: R12.1 R14.2 U4.1 | length 6.3
  Top Layer w0.2: R12.1@40.354,30.625 R12.1
  Top Layer w0.3: R12.1@40.354,30.625 40.375,30.604 R14.2 ; R12.1 41.375,30.625 41.85,31.1 U4.1
RTS: Q1.3 R8.1 U2.24 | length 57.5
  Top Layer w0.2: R8.1 47.055,48.42 48.1,47.375 48.1,47.15 Q1.3 48.375,44.154 48.779,43.75 67.25,43.75 69.375,41.625 69.375,13.159 70.434,12.1 70.5,12.1 70.6,12 U2.24
RXD: R6.1 U1.34 | length 63.1
  Top Layer w0.2: U1.34 36.175,62.5 36.3,62.625 v1(38.125,62.625) ; v1(41.5,62.5) 43.375,62.5 52.375,53.5 v1(52.375,48.25) ; R6.1 65.06,34.935 v1(65.126,35)
  Bottom Layer w0.2: v1(38.125,62.625) 38.188,62.563 41.437,62.563 v1(41.5,62.5) ; v1(52.375,48.25) 52.375,47.875 65.126,35.124 v1(65.126,35)
RXD_CP2109: R7.2 U2.25 | length 65
  Top Layer w0.2: R7.2 47.485,50.83 47.485,50.66 52.395,45.75 v1(56.375,45.75) ; v1(68.25,17.875) 68.25,13.625 70.375,11.5 U2.25
  Bottom Layer w0.2: v1(56.375,45.75) 65.25,45.75 70.5,40.5 70.5,33.5 75.375,28.625 75.375,22.25 70.967,17.842 68.283,17.842 v1(68.25,17.875)
TXD: R7.1 U1.35 | length 20.9
  Top Layer w0.2: U1.35 38.555,63.945 39.375,63.125 39.375,52.125 40.25,51.25 R7.1
TXD_CP2109: R6.2 U2.26 | length 7
  Top Layer w0.2: R6.2 66.94,14.219 70.159,11 U2.26
USB_N: J4.2 U2.5 | length 22.1
  Top Layer w0.15: U2.5 73.75,8.837 73.65,8.737 73.65,8.244 74.074,7.82 v2(74.074,7.698) ; v2(83.45,10.075) 83.495,10.075 83.87,10.45 84.638,10.45 85.613,9.475 86.925,9.475 87.1,9.3 J4.2
  Bottom Layer w0.15: v2(74.074,7.698) 74.074,7.58 73.65,7.156 74.656,6.15 82.375,6.15 84.175,7.95 84.175,10.269 83.994,10.45 83.87,10.45 83.495,10.075 v2(83.45,10.075)
USB_P: J4.3 U2.4 | length 23.5
  Top Layer w0.15: v2(73.025,7.75) 73.025,7.919 73.35,8.244 73.35,8.737 73.25,8.837 U2.4 ; v2(83.45,11.125) 83.495,11.125 83.87,10.75 84.762,10.75 85.737,9.775 86.925,9.775 87.1,9.95 J4.3
  Bottom Layer w0.15: v2(73.025,7.75) 73.025,7.561 73.35,7.236 73.35,7.032 74.531,5.85 82.499,5.85 84.475,7.826 84.475,10.394 84.119,10.75 83.87,10.75 83.495,11.125 v2(83.45,11.125)
V5V: C17.2 C18.2 D2.C J2.2 J3.2 J5.2 J6.2 L1.2 R12.2 | length 155.6
  Top Layer w0.2: L1.2 55.375,24.469 55.738,24.106
  Top Layer w0.8: J2.2 J2.2@7.046,31.256 ; J6.2@7.046,42.962 J6.2 ; v1(11.5,43) 15,43 16,42 28.5,42 35.125,35.375 55,35.375 58.875,31.5 58.875,26.344 58.406,25.875 L1.2 55.25,25.75 v1(51.5,25.75) ; v1(38.213,32.787) 38.3,32.7 40.3,32.7 R12.2 ; L1.2@55.75,25.5 55.75,22.762 C17.2 C18.2 55.738,20.235 62.793,13.18 64.025,13.18 D2.C
  Bottom Layer w0.8: 5.711,19.381 3.296,21.796 3.296,28.546 5.921,31.171 J2.2@6.43,31.171 ; J2.2 6.93,31.288 6.43,31.288 3.421,34.296 3.421,40.421 6,43 7,43 J6.2 7.093,43 v1(11.5,43) ; J5.2 5.461,7.506 3.421,9.546 3.421,16.921 5.881,19.381 J3.2 ; v1(38.213,32.787) 38.213,30.537 43,25.75 v1(51.5,25.75)
VDD33: C1.2 C2.2 C5.2 C8.2 C9.1 C10.2 C19.1 J1.4 R1.2 R2.2 R3.2 R4.2 R9.2 R11.2 U1.2 U2.6 U2.7 U3.3 | length 265.1
  Top Layer w0.2: R1.2 R1.2@10.83,65.18 ; C1.2 15.675,68.5 15.675,67.989 ; v1(72.625,2.25) 75.625,2.25 76,2.625 76,3.7 C9.1 C9.1@75.915,3.785 ; U2.6 74.25,8.85 74.725,8.375 75,8.375 75,8.6 74.75,8.85 U2.7 ; R2.2@74.625,19.32 R2.2
  Top Layer w0.8: v1(8.75,62.375) 8.81,62.435 8.81,64.061 9.844,65.095 10.745,65.095 10.83,65.18 10.915,65.265 10.915,66.665 12.45,68.2 12.45,68.425 C2.2@12.525,68.5 ; C2.2 C1.2 ; 15.675,67.989 17.129,66.535 17.95,66.535 U1.2 ; v1@19.375,33.125 v1(20.75,33.125) 20.84,33.035 21.215,33.035 21.925,32.325 21.925,32.125 C19.1@21.975,32.075 ; C19.1@22.375,32.075 C19.1 22.225,32.125 22.575,32.125 22.65,32.2 U3.3 ; R11.2@30,27.025 R11.2 30,28.998 30.25,29.248 v1(30.25,29.375) ; v1(43.75,53) 43.75,53.127 43.943,53.32 44.274,53.651 44.274,54.675 44.349,54.75 R9.2 ; v1@43.967,53.09 44.172,53.09 44.207,53.125 45.125,53.125 46.41,54.41 46.41,54.91 v1(47.125,55.625) ; v1(74.625,17.5) R2.2@74.625,19.32 ; R2.2 R4.2 ; R3.2 R4.2 ; 75,8.375 75.248,8.375 75.873,7.75 v1(76,7.75) ; C10.2 C10.2@75.915,5.715 ; C9.1@75.915,3.785 C10.2@75.915,5.715 ; C8.2 78.693,5.693 75.936,5.693 C10.2@75.915,5.715 ; v1(83.5,32.625) 83.773,32.625 90,26.398 90,23.361 89.531,22.893 88.791,22.893 88.784,22.9 J1.4 ; J1.4@88.2,22.893 81.643,22.893 80.813,22.063 R4.2 ; C5.2 89.488,56.137 v1(89.875,55.75)
  Bottom Layer w0.2: v1(72.625,2.25) 72.25,2.625 72.25,8 72.725,8.475 75.275,8.475 v1(76,7.75)
  Bottom Layer w0.8: v1(8.75,62.375) 8.877,62.375 9.252,62.75 22.625,62.75 24.375,61 43,61 47.125,56.875 v1(47.125,55.625) 47.252,55.625 47.82,55.058 65.058,55.058 68.75,58.75 86.875,58.75 v1(89.875,55.75) 89.875,39 v1(83.5,32.625) ; v1(19.25,33.125) v1(20.75,33.125) ; v1(30.25,29.375) 26.5,33.125 v1(20.75,33.125) ; v1(43.75,53) 36.625,45.875 28.125,45.875 20.75,38.5 v1(20.75,33.125) ; v1(74.625,17.5) 78.375,13.75 78.375,9 77.125,7.75 v1(76,7.75)
VIN: C14.2 C15.2 D3.C U4.3 U4.4 | length 37.8
  Top Layer w0.2: v1(42.425,29.8) v1@42.447,29.8 ; U4.4 44.645,27.88 45.62,26.905 C15.2
  Top Layer w0.4: U4.4 43.097,29.15 42.447,29.8 U4.3
  Top Layer w0.8: C14.2 45.61,24.26 45.61,26.74 C15.2 ; v1(59,37.75) 61,39.75 D3.C D3.C@66.045,38.92
  Bottom Layer w0.8: v1(42.425,29.8) 51.175,29.8 58.5,37.125
VUSB: C6.2 C7.1 C11.1 C12.2 D2.A J4.1 U2.8 U3.1 | length 92.2
  Top Layer w0.2: U2.8 76.375,10 v1(77,9.375) ; 86.25,8.625 86.275,8.65 J4.1
  Top Layer w0.8: C11.1 20.3,36.975 20.395,36.88 C12.2 24.22,36.88 24.3,36.8 U3.1@24.39,36.8 ; v1(24.232,39.143) 24.34,39.035 24.34,36.85 U3.1@24.39,36.8 ; U3.1 U3.1@24.39,36.8 ; v1(64.75,3.25) D2.A ; v1(77,9.375) 77.051,9.324 78.699,9.324 C6.2 78.89,9.274 79.114,9.05 C7.1 81.2,9.05 81.625,8.625 86.25,8.625
  Bottom Layer w0.8: v1(24.232,39.143) 26.482,39.143 62.375,3.25 v1(64.75,3.25) 70.875,9.375 v1(77,9.375)
pads on no net: J1.1 J1.2 J1.8 J1.DL J1.DS J1.SM1 J1.SM2 J1.SM3 J1.SM4 J4.4 J4.SH1 J4.SH2 J4.SH3 J4.SH4 J4.SH5 J4.SH6 S1.2 S1.4 S2.2 S2.4 U1.4 U1.5 U1.14 U1.16 U1.17 U1.18 U1.19 U1.20 U1.21 U1.22 U1.26 U1.27 U1.28 U1.29 U1.31 U1.32 U1.33 U2.1 U2.2 U2.9 U2.10 U2.11 U2.12 U2.13 U2.14 U2.15 U2.16 U2.17 U2.18 U2.19 U2.20 U2.21 U2.22 U2.23 U2.27

## Polygon pours and split planes (outlines as drawn)
GND on Top Layer "Top Layer-No Net" (solid, remove dead copper, pour order 0): 0,72.5 0,0 93,0 93,72.5
GND on Bottom Layer "Bottom Layer-No Net" (solid, remove dead copper, pour order 1): 0,0 93,0 93,72.5 0,72.5 0,0

## Keep-outs
Keep-Out Layer:
  the board outline again, w0.508

## Silkscreen, mask and mechanical layers (free items; w line width, h text height)
Board:
  the board outline again, w0.508
Drill Drawing:
  circle w0.254: c110.507,30.584 r0.921
  lines w0.254: 109.586,13.542 110.046,13.542 110.046,13.082 110.968,13.082 110.968,13.542 111.428,13.542 111.428,14.463 110.968,14.463 110.968,14.924 110.046,14.924 110.046,14.463 109.586,14.463 109.586,13.542 ; 109.586,17.227 110.507,17.687 111.428,17.227 110.968,18.148 111.428,19.069 110.507,18.609 109.586,19.069 110.046,18.148 109.586,17.227 ; 109.586,21.372 111.428,21.372 111.428,23.214 109.586,23.214 109.586,21.372 ; 109.586,27.36 111.428,27.36 110.507,25.517 109.586,27.36 ; 109.586,33.808 109.586,34.269 110.046,34.729 109.586,35.19 109.586,35.65 110.046,35.65 110.507,35.19 110.968,35.65 111.428,35.65 111.428,35.19 110.968,34.729 111.428,34.269 111.428,33.808 110.968,33.808 110.507,34.269 110.046,33.808 109.586,33.808
  lines w0.381: 107.941,11.838 286.496,11.838 ; 107.941,36.71 286.496,36.71 ; 118.587,7.693 118.587,40.855 ; 127.34,7.693 127.34,40.855 ; 145.596,7.693 145.596,40.855 ; 153.852,7.693 153.852,40.855 ; 165.866,7.693 165.866,40.855 ; 188.621,7.693 188.621,40.855 ; 198.468,7.693 198.468,40.855 ; 211.33,7.693 211.33,40.855 ; 232.712,7.693 232.712,40.855 ; 245.63,7.693 245.63,40.855 ; 265.712,7.693 265.712,40.855 ; 107.941,7.693 286.496,7.693 286.496,40.855 107.941,40.855 107.941,7.693
  text "Symbol" at 110.428,37.953 h2.4
  text "Count" at 119.83,37.953 h2.4
  text "Hole Size" at 128.583,37.953 h2.4
  text "Plated" at 146.84,37.953 h2.4
  text "Hole Type" at 155.095,37.953 h2.4
  text "Drill Layer Pair" at 167.109,37.953 h2.4
  text "Via/Pad" at 189.864,37.953 h2.4
  text "Pad Shape" at 199.712,37.953 h2.4
  text "Template" at 212.574,37.953 h2.4
  text "Description" at 233.956,37.953 h2.4
  text "Hole Tolerance (+)" at 246.874,37.953 h2.4
  text "Hole Tolerance (-)" at 266.955,37.953 h2.4
  text "1" at 119.83,33.808 h2
  text "0.620mm (24.41mil)" at 128.583,33.808 h2
  text "PTH" at 146.84,33.808 h2
  text "Round" at 155.095,33.808 h2
  text "Top Layer - Bottom Layer" at 167.109,33.808 h2
  text "Via" at 189.864,33.808 h2
  text "Rounded" at 199.712,33.808 h2
  text "v100h62" at 212.574,33.808 h2
  text "1" at 119.83,29.663 h2
  text "1.000mm (39.37mil)" at 128.583,29.663 h2
  text "PTH" at 146.84,29.663 h2
  text "Slot" at 155.095,29.663 h2
  text "Top Layer - Bottom Layer" at 167.109,29.663 h2
  text "Pad" at 189.864,29.663 h2
  text "Rounded" at 199.712,29.663 h2
  text "r440_220h100_360r100" at 212.574,29.663 h2
  text "2" at 119.83,25.517 h2
  text "1.000mm (39.37mil)" at 128.583,25.517 h2
  text "PTH" at 146.84,25.517 h2
  text "Slot" at 155.095,25.517 h2
  text "Top Layer - Bottom Layer" at 167.109,25.517 h2
  text "Pad" at 189.864,25.517 h2
  text "Rounded" at 199.712,25.517 h2
  text "r400_200h100_320r100" at 212.574,25.517 h2
  text "16" at 119.83,21.372 h2
  text "0.900mm (35.43mil)" at 128.583,21.372 h2
  text "PTH" at 146.84,21.372 h2
  text "Round" at 155.095,21.372 h2
  text "Top Layer - Bottom Layer" at 167.109,21.372 h2
  text "Pad" at 189.864,21.372 h2
  text "(Mixed)" at 199.712,21.372 h2
  text "(Mixed)" at 212.574,21.372 h2
  text "18" at 119.83,17.227 h2
  text "0.400mm (15.75mil)" at 128.583,17.227 h2
  text "PTH" at 146.84,17.227 h2
  text "Round" at 155.095,17.227 h2
  text "Top Layer - Bottom Layer" at 167.109,17.227 h2
  text "Via" at 189.864,17.227 h2
  text "Rounded" at 199.712,17.227 h2
  text "(Mixed)" at 212.574,17.227 h2
  text "52" at 119.83,13.082 h2
  text "0.711mm (28.00mil)" at 128.583,13.082 h2
  text "PTH" at 146.84,13.082 h2
  text "Round" at 155.095,13.082 h2
  text "Top Layer - Bottom Layer" at 167.109,13.082 h2
  text "Via" at 189.864,13.082 h2
  text "Rounded" at 199.712,13.082 h2
  text "v127h71" at 212.574,13.082 h2
  text "90 Total" at 119.83,8.936 h2
  text "Slot definitions :" at 110.428,6.035 h2
  text "Routed Path Length" at 124.068,6.035 h2
  text "= Calculated from tool start centre position to tool end centre position." at 140.964,6.035 h2
  text "Hole Length" at 124.068,4.376 h2
  text "= Routed Path Length + Tool Size = Slot length as defined in the PCB layout" at 134.693,4.376 h2

## Dimensions
0,0 to 0,72.5 on Drill Drawing
0,0 to 93,0 on Drill Drawing

## Text inside footprints (layer, text, board x,y; h text height)
J1: Mechanical 13 "Card Lock Position" at 93.805,21.399 h0.41 r270
J4: Mechanical 13 "PCB Edge" at 94.594,5.805 h0.81 r90